# Altium PCB XDM3.2.PcbDoc
Units mil, origin at the board's own origin, x right, y up, seen from the top; angles counter-clockwise.
Board outline 6000 x 4000 mil, 2 copper layers (Top Layer, Bottom Layer); 89 components, 0 nets, 394 pads, 121 vias.
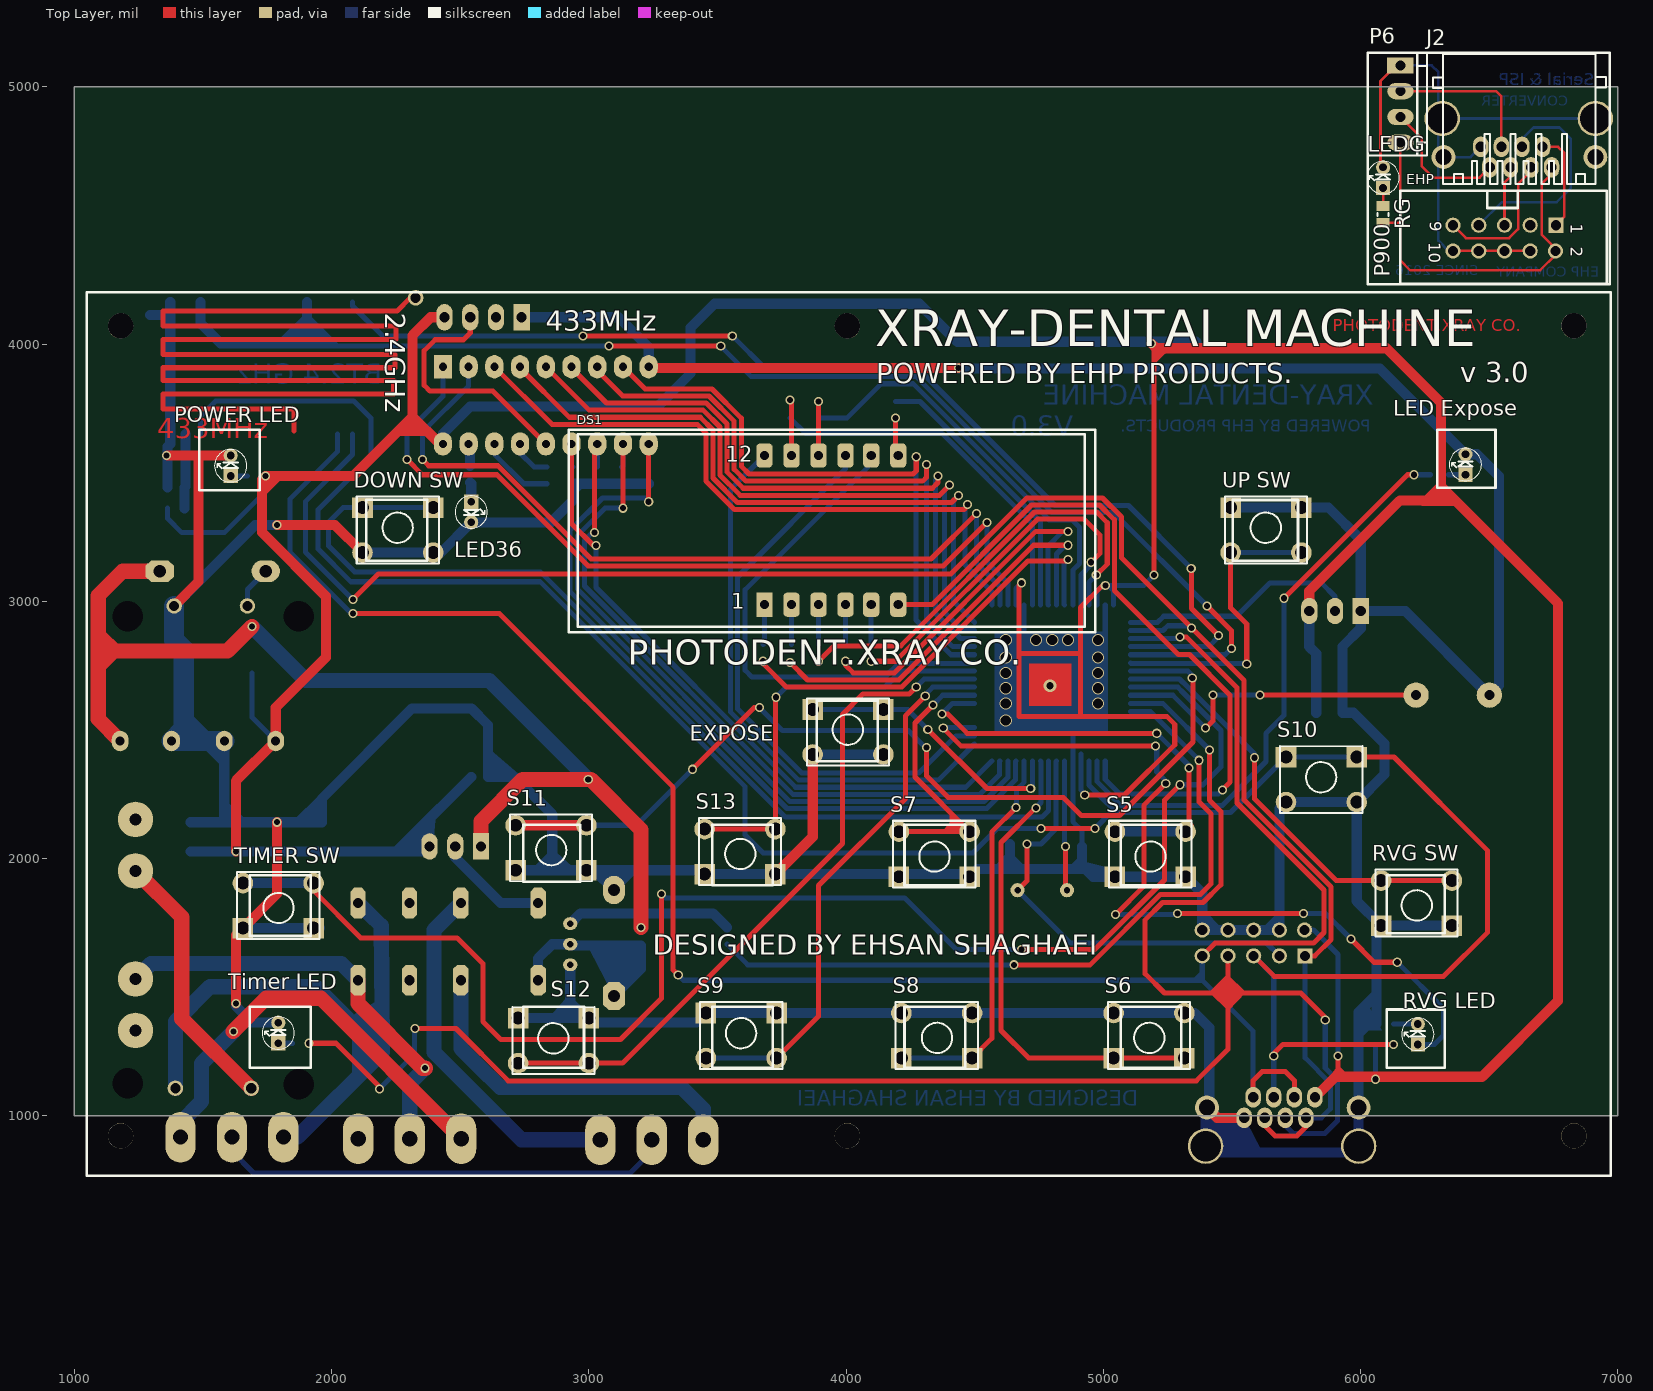
[diagram p0: Top Layer view]
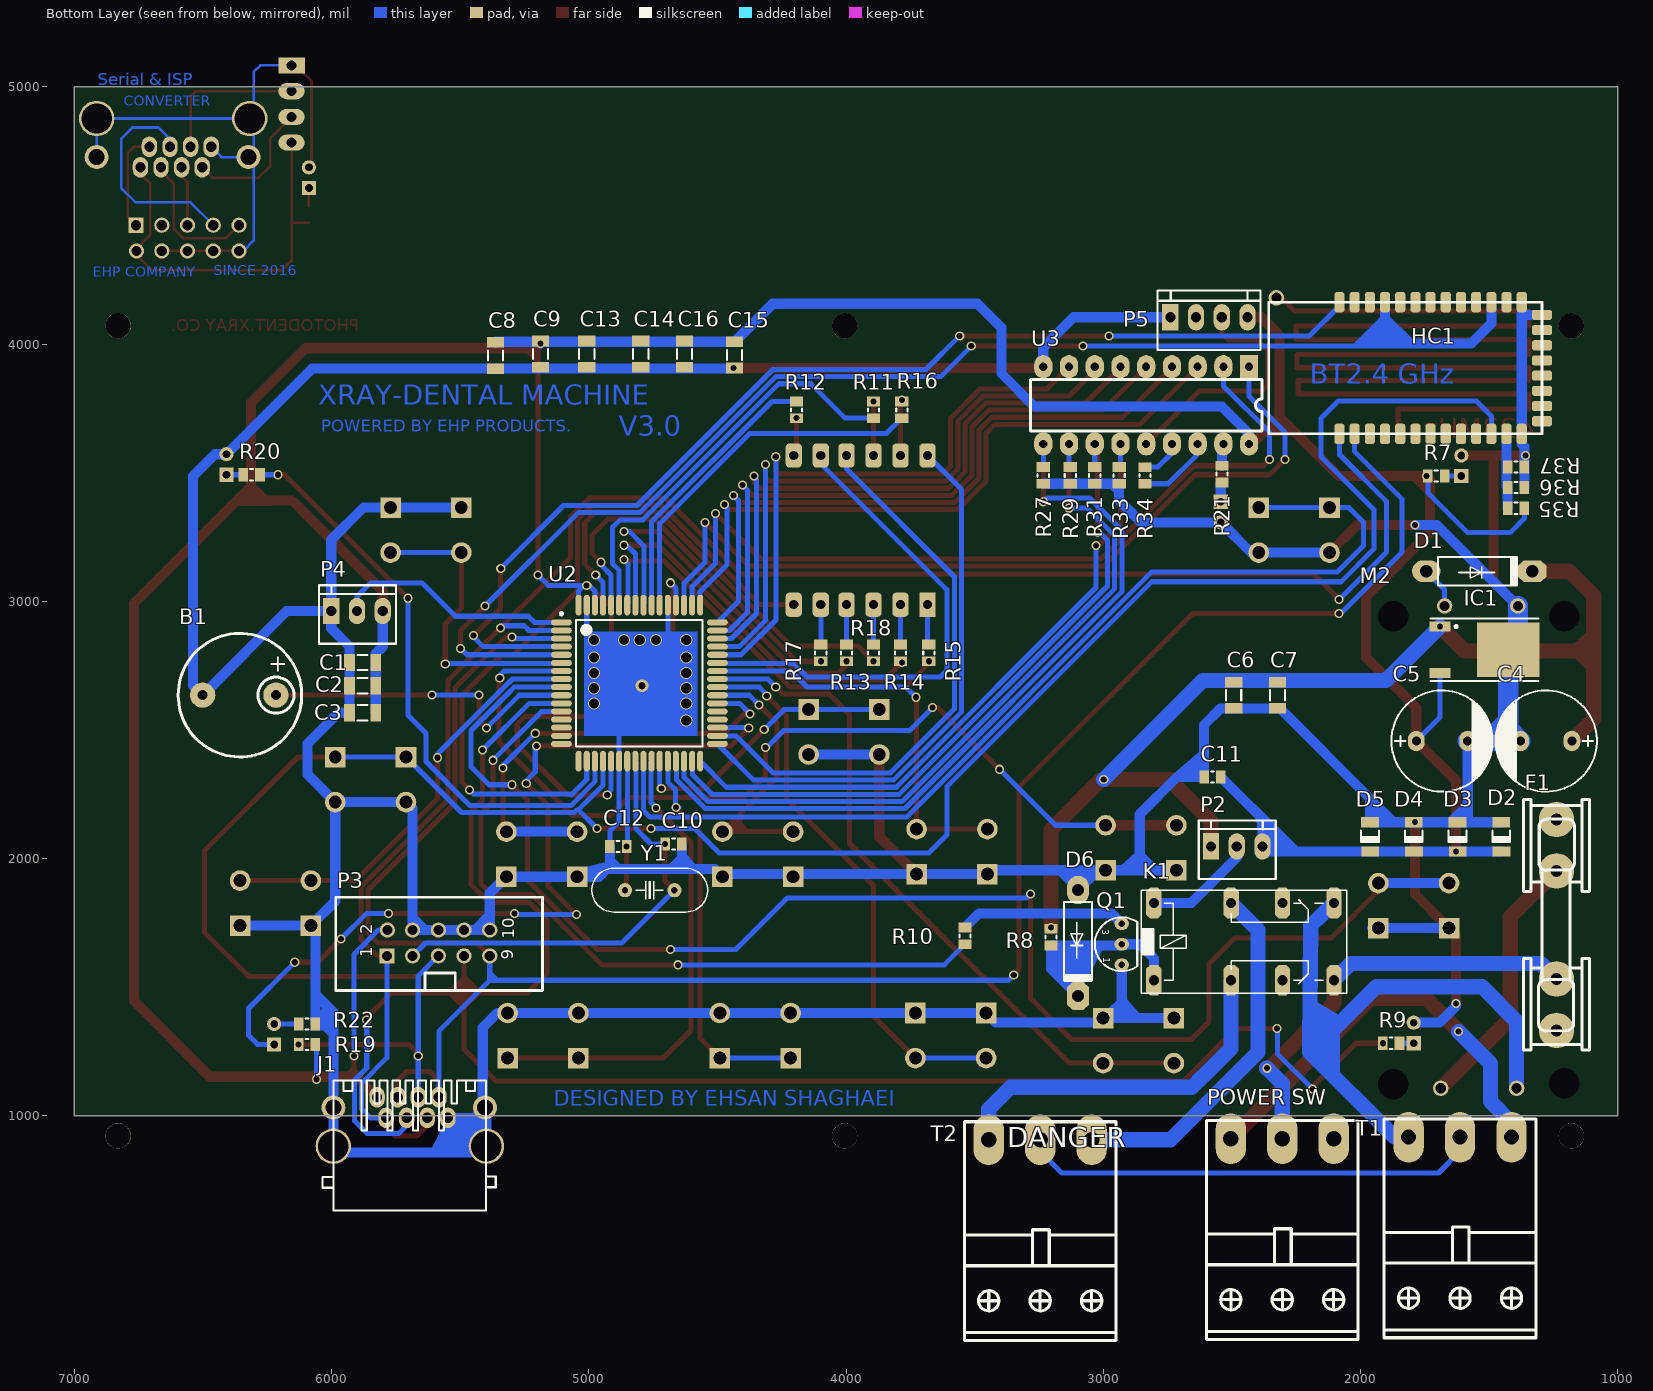
[diagram p1: Bottom Layer view, seen from below]

## Layer stack, top to bottom
Top Solder: solder mask 0.4, Solder Resist, Dk 3.5
Top Layer: signal copper 1.4
Dielectric 1: dielectric 12.6, FR-4, Dk 4.8
Bottom Layer: signal copper 1.4
Bottom Solder: solder mask 0.4, Solder Resist, Dk 3.5

## Board outline
1000,1000 7000,1000 7000,5000 1000,5000

## Design rules (kind name [scope] priority, off if disabled: settings)
Clearance [All] p1: gap=10
PolygonConnect [All] p1: connectstyle=Relief reliefconductorwidth=10 reliefentries=4 polygonreliefangle="90 Angle" airgapwidth=10
RoutingVias [All] p1: holewidth=28 width=50 viastyle="Through Hole" minholewidth=28 minwidth=50 maxholewidth=28 maxwidth=50
SolderMaskExpansion [All] p1: expansion=4
Width [All] p1: maxlimit=10 minlimit=10 preferedwidth=10
30 further rules are at their usual default settings.

## Components (designator, comment, footprint, x,y, rotation, side; value= is the part's Value field where it differs from the comment)
B1 "Buzzer" Buzzer 6368,2647 r180 bottom locked
C1 "10u" SMD_CAP_1206 5828,2762 r0 bottom locked
C2 "10u" SMD_CAP_1206 5828,2672 r0 bottom locked
C3 "100nF" SMD_CAP_1206 5828,2567 r0 bottom locked
C4 "1uF" "cap 04" 1278,2457 r180 bottom locked
C5 "1uF" "cap 04" 1683,2457 r0 bottom locked
C6 "10u" SMD_CAP_1206 2493,2686 r270 bottom locked
C7 "100nF" SMD_CAP_1206 2323,2686 r270 bottom locked
C8 "10u" SMD_CAP_1206 5363,4007 r270 bottom locked
C9 "100nF" SMD_CAP_1206 5188,4012 r270 bottom locked
C10 "18pF" SMD_CAP_0805 4638,2057 r0 bottom locked
C11 "100nF" SMD_CAP_0805 2608,2317 r180 bottom locked
C12 "18pF" SMD_CAP_0805 4918,2047 r180 bottom locked
C13 "10uF" SMD_CAP_1206 5008,4012 r270 bottom locked
C14 "10u" SMD_CAP_1206 4798,4012 r270 bottom locked
C15 "10u" SMD_CAP_1206 4433,4009.2 r270 bottom locked
C16 "100nF" SMD_CAP_1206 4628,4012 r270 bottom locked
D1 "1N4007" My_DO-41 1323.39,3127 r0 bottom locked
D2 "Diode Zener SMD" DIOMELF3615N 1453,2087 r90 bottom locked
D3 "Diode Zener SMD" DIOMELF3615N 1623,2087 r90 bottom locked
D4 "Diode Zener SMD" DIOMELF3615N 1793,2087 r90 bottom locked
D5 "Diode Zener SMD" DIOMELF3615N 1963,2087 r90 bottom locked
D6 "1N4007" My_DO-41 3088,1457 r90 bottom locked
"DOWN SW" "Switch PB" "Switch - Push to On" 2258,3277 r0 top locked
DS1 "7Segment-4Digit-CA" 7segCA 2958,2902 r0 top locked
EXPOSE "Switch PB" "Switch - Push to On" 4008,2492 r0 top locked
F1 "FUSE" FUSE_1 1238,1532 r90 bottom locked
HC1 "HC-05 Bluetooth" HC-05 1688,3907 r90 bottom locked
IC1 "L78M05" TO-252 1558,2812 r270 bottom locked
J1 "RJ45" My_RJ45 5698,742 r180 bottom locked
J2 "RJ45" My_RJ45 6618,5017 r180 top locked
K1 "Relay-DPDT" My_REL_cochick 2653,1677 r180 bottom locked
LED36 "Red" LED-3mm 2543,3347 r270 top locked
"LED Expose" "Red" LED-3mm 6408,3532 r90 top locked
LEDG "Red" LED-3mm 6088,4647 r90 top locked
M2 "220-12 Medule" "AC-DC 220-12" 1073,1027 r90 bottom locked
P2 "LHWR" "Polarized Header 3" 2483,2052 r180 bottom locked
P3 "BoxHeader 2x5" "Box Header 2x5" 5483,1622 r90 bottom locked
P4 "LHWR" "Polarized Header 3" 5903,2967 r180 bottom locked
P5 "LHWR" "Polarized Header 4" 2588,4112 r180 bottom locked
P6 "LHWR" "Polarized Header 4" 6163,4932 r270 top locked
P900 "BoxHeader 2x5" "Box Header 2x5" 6458,4462 r270 top locked
"POWER LED" "Red" LED-3mm 1608,3527 r90 top locked
"POWER SW" "PHONIX3" PHONIX3 2104,911 r0 bottom
Q1 "C945" C945 2928,1667 r270 bottom locked
R7 "330" "RES 0805 (2012X06L)" 1738,3487 r180 bottom locked
R8 "1K" "RES 0805 (2012X06L)" 3203,1662 r90 bottom locked
R9 "330" "RES 0805 (2012X06L)" 1913,1282 r180 bottom locked
R10 "330" "RES 0805 (2012X06L)" 3538,1667 r90 bottom locked
R11 "330" "RES 0805 (2012X06L)" 3783,3712 r90 bottom locked
R12 "330" "RES 0805 (2012X06L)" 4193,3776.96 r270 bottom locked
R13 "330" "RES 0805 (2012X06L)" 3998,2767 r90 bottom locked
R14 "330" "RES 0805 (2012X06L)" 3788,2767 r90 bottom locked
R15 "330" "RES 0805 (2012X06L)" 3678,2767 r90 bottom locked
R16 "330" "RES 0805 (2012X06L)" 3893,3712 r90 bottom locked
R17 "330" "RES 0805 (2012X06L)" 4098,2767 r90 bottom locked
R18 "330" "RES 0805 (2012X06L)" 3893,2767 r90 bottom locked
R19 "10K" "RES 0805 (2012X06L)" 6063.04,1277 r0 bottom locked
R20 "330" "RES 0805 (2012X06L)" 6278,3492 r0 bottom locked
R21 "330" "RES 0805 (2012X06L)" 2538,3527 r270 bottom locked
R22 "330" "RES 0805 (2012X06L)" 6063,1357 r0 bottom locked
R27 "1K" "RES 0805 (2012X06L)" 3233,3522 r270 bottom locked
R29 "1K" "RES 0805 (2012X06L)" 3128,3522 r270 bottom locked
R31 "1K" "RES 0805 (2012X06L)" 3033,3522 r270 bottom locked
R33 "1K" "RES 0805 (2012X06L)" 2938,3522 r270 bottom locked
R34 "820k" "RES 0805 (2012X06L)" 2838,3457 r90 bottom locked
R35 "51k" "RES 0805 (2012X06L)" 1428,3362 r180 bottom locked
R36 "100k" "RES 0805 (2012X06L)" 1363,3442 r0 bottom locked
R37 "100k" "RES 0805 (2012X06L)" 1363,3522 r0 bottom locked
RG "330" "RES 0805 (2012X06L)" 6088,4472 r90 top locked
"RVG LED" "Red" LED-3mm 6223,1317 r90 top locked
"RVG SW" "Switch PB" "Switch - Push to On" 6218,1827 r180 top locked
S5 "Switch PB" "Switch - Push to On" 5183,2017 r180 top locked
S6 "Switch PB" "Switch - Push to On" 5178,1312 r180 top locked
S7 "Switch PB" "Switch - Push to On" 4343,2017 r180 top locked
S8 "Switch PB" "Switch - Push to On" 4353,1312 r180 top locked
S9 "Switch PB" "Switch - Push to On" 3593,1312 r0 top locked
S10 "Switch PB" "Switch - Push to On" 5848,2307 r0 top locked
S11 "Switch PB" "Switch - Push to On" 2853,2042 r180 top locked
S12 "Switch PB" "Switch - Push to On" 2863,1292 r0 top locked
S13 "Switch PB" "Switch - Push to On" 3588,2027 r180 top locked
T1 "PHONIX3" PHONIX3 1413,917 r0 bottom locked
T2 "PHONIX3" PHONIX3 3045,907 r0 bottom
"Timer LED" "Red" LED-3mm 1793,1322 r90 top locked (schematic designator Timer)
"TIMER SW" "Switch PB" "Switch - Push to On" 1793,1817 r180 top locked
U2 "ATmega64A-AU" 64A_M 4803,2682 r180 bottom locked
U3 "PT2272" DIP18 2433,3912 r270 bottom locked
"UP SW" "Switch PB" "Switch - Push to On" 5633,3277 r0 top locked
Y1 "16MHz" "XTAL Small" 4763,1877 r0 bottom locked

## Footprints (in the part's own frame and the unit in brackets; to place one, negate y for a bottom-side part, rotate by r counter-clockwise, add the part's x,y. Pads: shape width x height; smd on the part's side, far side on the other; paste and mask are expansions set on the pad)
7segCA [mm] "7seg-CA; 12 Leads"
  rect 1.6x2.4 hole 0.9: 1(18.415,2.159)
  rrect50% 1.6x2.4 hole 0.9: 2(21.082,2.159) 3(23.749,2.159) 4(26.416,2.159) 5(28.956,2.159) 6(31.623,2.159) 7(31.623,16.891) 8(28.956,16.891) 9(26.416,16.891) 10(23.749,16.891) 11(21.082,16.891) 12(18.415,16.891)
  silkscreen extent 0,0 50.04,19
64A_M [mm] "Thin QFP, 64-Leads, Body 14x14mm, Pitch 0.8mm, IPC Low Density"
  oval 2.05x0.6 smd: 1(-7.7,6) 2(-7.7,5.2) 3(-7.7,4.4) 4(-7.7,3.6) 5(-7.7,2.8) 6(-7.7,2) 7(-7.7,1.2) 8(-7.7,0.4) 9(-7.7,-0.4) 10(-7.7,-1.2) 11(-7.7,-2) 12(-7.7,-2.8) 13(-7.7,-3.6) 14(-7.7,-4.4) 15(-7.7,-5.2) 16(-7.7,-6) 33(7.7,-6) 34(7.7,-5.2) 35(7.7,-4.4) 36(7.7,-3.6) 37(7.7,-2.8) 38(7.7,-2) 39(7.7,-1.2) 40(7.7,-0.4) 41(7.7,0.4) 42(7.7,1.2) 43(7.7,2) 44(7.7,2.8) 45(7.7,3.6) 46(7.7,4.4) 47(7.7,5.2) 48(7.7,6)
  oval 0.6x2.05 smd: 17(-6,-7.7) 18(-5.2,-7.7) 19(-4.4,-7.7) 20(-3.6,-7.7) 21(-2.8,-7.7) 22(-2,-7.7) 23(-1.2,-7.7) 24(-0.4,-7.7) 25(0.4,-7.7) 26(1.2,-7.7) 27(2,-7.7) 28(2.8,-7.7) 29(3.6,-7.7) 30(4.4,-7.7) 31(5.2,-7.7) 32(6,-7.7) 49(6,7.7) 50(5.2,7.7) 51(4.4,7.7) 52(3.6,7.7) 53(2.8,7.7) 54(2,7.7) 55(1.2,7.7) 56(0.4,7.7) 57(-0.4,7.7) 58(-1.2,7.7) 59(-2,7.7) 60(-2.8,7.7) 61(-3.6,7.7) 62(-4.4,7.7) 63(-5.2,7.7) 64(-6,7.7)
  silkscreen extent -7.83,-6.25 6.25,6.97, body extent -7,-7 7,7, height 1.2
"AC-DC 220-12" [mil]
  round 60 hole 39.37: 0(1955,600) 1(1955,315) 2(80,615) 3(80,320)
  round 60 hole 118.11: 4(1915,135) 5(1915,800) 6(95,800) 7(100,135)
  body extent 6,-5 2014,940, height 118
"Box Header 2x5" [mm]
  rect 1.5x1.5 hole 1: 1(-0.006,7.666)
  round 1.5 hole 1: 2(2.54,7.62) 3(-0.006,5.126) 4(2.534,5.126) 5(-0.006,2.586) 6(2.534,2.586) 7(-0.006,0.046) 8(2.534,0.046) 9(-0.006,-2.494) 10(2.534,-2.494)
  silkscreen extent -3.42,-7.7 5.8,12.7, body extent -3.4,-7.7 5.7,12.66, height 9.43
Buzzer [mm] "Magnetic Transducer"
  round 2.5 hole 1: 1(3.859,-0.297) 2(-3.38,-0.297)
  silkscreen extent -5.8,-6.4 6.4,5.8, body extent -5.67,-6.39 6.17,5.45, height 6.98
C945 [mil] "NPN Transistor"
  oval 50x55 hole 25: 1(80,0) 2(0,0) 3(-80,0)
  silkscreen extent -105,-105 105,61, body extent -94,-96 95,58, height 315
"cap 04" [mil]
  oval 65x80 hole 35: 1(100,0) 2(-100,0)
  silkscreen extent -197,-197 197,197, body extent -198,-197 198,199, height 513
DIOMELF3615N [mm] "MELF Diode, 2-Leads, Body 3.6x1.5mm, IPC Medium Density"
  rect 1x1.75 smd: 1(-1.495,-0.03) 2(1.38,-0.005)
  silkscreen extent -0.55,-0.88 0.55,0.88, body extent -1.61,-0.83 1.54,0.67, height 1.45
DIP18 [mm]
  rect 2.3x1.8 hole 0.8: 1(0,0)
  oval 2.3x1.8 hole 0.8: 2(0,-2.54) 3(0,-5.08) 4(0,-7.62) 5(0,-10.16) 6(0,-12.7) 7(0,-15.24) 8(0,-17.78) 9(0,-20.32) 10(7.62,-20.32) 11(7.62,-17.78) 12(7.62,-15.24) 13(7.62,-12.7) 14(7.62,-10.16) 15(7.62,-7.62) 16(7.62,-5.08) 17(7.62,-2.54) 18(7.62,0)
  silkscreen extent 1.27,-21.59 6.35,1.27
FUSE_1 [mm]
  round 3.5 hole 1.2: 1(0,0) 2(10.668,0) ""(-5.08,0) ""(15.748,0)
  silkscreen extent -7.04,-3.25 17.7,3.25
HC-05 [mm]
  rrect50% 2x1 smd: 1(-6.5,10) 2(-6.5,8.5) 3(-6.5,7) 4(-6.5,5.5) 5(-6.5,4) 6(-6.5,2.5) 7(-6.5,1) 8(-6.5,-0.5) 9(-6.5,-2) 10(-6.5,-3.5) 11(-6.5,-5) 12(-6.5,-6.5) 13(-6.5,-8) 22(6.5,-8) 23(6.5,-6.5) 24(6.5,-5) 25(6.5,-3.5) 26(6.5,-2) 27(6.5,-0.5) 28(6.5,1) 29(6.5,2.5) 30(6.5,4) 31(6.5,5.5) 32(6.5,7) 33(6.5,8.5) 34(6.5,10)
  rrect50% 1x2 smd: 14(-5.254,-10) 15(-3.754,-10) 16(-2.254,-10) 17(-0.754,-10) 18(0.746,-10) 19(2.246,-10) 20(3.746,-10) 21(5.246,-10)
  silkscreen extent -6.5,-10 6.5,17, body extent -6.5,-9.77 6.5,17.13, height 2.5
LED-3mm [mil]
  rect 55x55 hole 30: 1(-40,0)
  round 55 hole 30: 2(40,0)
  silkscreen extent -63,-63 63,63, body extent -69,-69 69,69, height 154
My_DO-41 [mil]
  oval 110x85 hole 47.24: A(420.71,10)
  oct 110x85 hole 47.24: K(8.9,10)
  silkscreen extent 64,-45 375,65
My_REL_cochick [mil]
  oct 60x120 hole 40: 1(-150,-150) 2(-150,150) O1(350,-150) O2(350,150) P1(150,-150) P2(150,150) S1(550,-150) S2(550,150)
  silkscreen extent -200,-200 600,200
My_RJ45 [mil]
  oval 60x80 hole 40: 1(150,250) 2(115,330) 3(70,250) 4(35,330) 5(-10,250) 6(-45,330) 7(-90,250) 8(-125,330)
  round 137.8 hole 118.11 unplated: shild(-295,140) shild(300,140)
  round 92.99 hole 62.01: shild(-295,290) shild(295,290)
  silkscreen extent -336,-110 336,395
PHONIX3 [mm]
  oval 3x5 hole 1.5: 1(0,0) 2(5.08,0) 3(10.16,0)
  silkscreen extent -2.41,-1.78 12.57,19.81
"Polarized Header 3" [mm]
  rect 1.6x2.6 hole 1: 1(-2.49,-0.12)
  oval 1.6x2.6 hole 1: 2(0.05,-0.12) 3(2.59,-0.12)
  silkscreen extent -3.7,-3.35 3.9,2.42, body extent -3.72,-3.35 3.9,2.45, height 10.75
"Polarized Header 4" [mm]
  rect 1.6x2.6 hole 1: 1(-3.84,-0.2)
  oval 1.6x2.6 hole 1: 2(-1.3,-0.2) 3(1.24,-0.2) 4(3.78,-0.2)
  silkscreen extent -5.1,-3.42 5.05,2.45, body extent -5.06,-3.43 5.1,2.37, height 10.75
"RES 0805 (2012X06L)" [mm] "Chip Resistor, 2-Leads, Body 2.0x1.3mm, IPC High Density _ (0.100 W)"
  rect 0.95x1.3 smd: 1(0,0) 2(1.65,0)
  silkscreen extent 0.67,-0.55 0.98,0.55, body extent -0.19,-0.63 1.84,0.64, height 0.6
SMD_CAP_0805 [mm]
  rect 0.95x1.3 smd: 1(0,0) 2(1.65,0)
  silkscreen extent 0.67,-0.55 0.98,0.55, body extent -0.19,-0.64 1.84,0.63, height 0.65
SMD_CAP_1206 [mm]
  rect 1.05x1.7 smd: 1(0,0) 2(2.596,0)
  silkscreen extent 0.8,-0.75 1.8,0.75, body extent -0.22,-0.77 2.82,0.75, height 0.75
"Switch - Push to On" [mil]
  rect 80x80 hole 50: 1(-137.5,87.5) 1(137.5,87.5)
  round 80 hole 50: 2(-137.5,-87.5) 2(137.5,-87.5)
  silkscreen extent -160,-130 160,130, body extent -155,-121 157,123, height 205
TO-252 [mm] "D-PAK/TO-252-AA; 3 Leads (1 Cropped); Body 10.1 (inc. leads) x 6.6 mm (LxW max)"
  rect 1x2.1 smd: 1(-2.285,-3.375) 3(2.285,-3.375)
  rect 5.4x6.2 smd: 4(0,3.375)
  silkscreen extent -3.08,-4.33 3.08,6.37, body extent -3.27,-4.11 3.27,5.83, height 2.39
"XTAL Small" [mil]
  round 55 hole 25: 1(-96.06,0) 2(96.06,0)
  silkscreen extent -225,-85 225,85, body extent -226,-89 226,89, height 140

## Part data
C1 C2 C3 C6 C7 C8 C9 C10 C11 C12 C13 C14 C15 C16: library part Cap-Bipolar, "Bipolar Capacitor"
C4 C5: library part Cap-Polar, "Polar Capacitor"
D1 D6: "1 Amp Diode"
"DOWN SW" EXPOSE "RVG SW" S5 S6 S7 S8 S9 S10 S11 S12 S13 "TIMER SW" "UP SW": "Push Button Switch"
DS1: library part 7Seg-4Digit-CA, "7-Segment Display: CA"
IC1: "Precision 500mA Regulator"
J1 J2: "Right Angle, Standard Profile, RJ45-Keyed, Flange Mount PCB Jack"
K1: "Dual-Pole Dual-Throw Relay"
LED36 "LED Expose" LEDG "POWER LED" "RVG LED" "Timer LED": library part LED, "LED"
P2 P4: library part "3pin LHWR"
P5 P6: library part "4pin LHWR"
Q1: "NPN Transistor"
R7 R8 R9 R10 R11 R12 R13 R14 R15 R16 R17 R18 R19 R20 R21 R22 R27 R29 R31 R33 R34 R35 R36 R37 RG: library part Resistor, "Resistor"
U2: "8-bit AVR Microcontroller, 64KB Flash, 2KB EEPROM, 4KB SRAM, 64-pin TQFP, Industrial Grade (-40°C to 85°C)"
Y1: library part XTAL, "XTAL Crystal"

## Free pads (board coordinates)
  round 98.43 hole 98.43: 1(1180.36,921.54) 1(1180.36,4071.15) 1(4005.16,921.54) 1(4005.16,4071.15) 1(6829.96,921.54) 1(6829.96,4071.15)
  round 60 hole 39.37: ANTENNA(2327,4180)

## Via types
v1: diameter 35.43, hole 23.62, Top Layer to Bottom Layer, 106 vias
v2: diameter 47.24, hole 39.37, Top Layer to Bottom Layer, 14 vias
v3: diameter 50, hole 28, Top Layer to Bottom Layer, 1 vias

## Nets (pads, with @x,y where several pads share a name; then routed paths per layer and width w, separated by ;. In a path a pad name is that pad's centre, name@x,y a point inside that pad or via, vN(x,y) a via of type N, cw(c..) or ccw(c..) an arc to the next point about the centre after c; other vN are vias at no path point)
pads on no net: "DOWN SW.1" "DOWN SW.2" "LED Expose.1" "LED Expose.2" "POWER LED.1" "POWER LED.2" "POWER SW.1" "POWER SW.2" "POWER SW.3" "RVG LED.1" "RVG LED.2" "RVG SW.1" "RVG SW.2" "Timer LED.1" "Timer LED.2" "TIMER SW.1" "TIMER SW.2" "UP SW.1" "UP SW.2" B1.1 B1.2 C1.1 C1.2 C2.1 C2.2 C3.1 C3.2 C4.1 C4.2 C5.1 C5.2 C6.1 C6.2 C7.1 C7.2 C8.1 C8.2 C9.1 C9.2 C10.1 C10.2 C11.1 C11.2 C12.1 C12.2 C13.1 C13.2 C14.1 C14.2 C15.1 C15.2 C16.1 C16.2 D1.A D1.K D2.1 D2.2 D3.1 D3.2 D4.1 D4.2 D5.1 D5.2 D6.A D6.K DS1.1 DS1.2 DS1.3 DS1.4 DS1.5 DS1.6 DS1.7 DS1.8 DS1.9 DS1.10 DS1.11 DS1.12 EXPOSE.1 EXPOSE.2 F1. F1.1 F1.2 HC1.1 HC1.2 HC1.3 HC1.4 HC1.5 HC1.6 HC1.7 HC1.8 HC1.9 HC1.10 HC1.11 HC1.12 HC1.13 HC1.14 HC1.15 HC1.16 HC1.17 HC1.18 HC1.19 HC1.20 HC1.21 HC1.22 HC1.23 HC1.24 HC1.25 HC1.26 HC1.27 HC1.28 HC1.29 HC1.30 HC1.31 HC1.32 HC1.33 HC1.34 IC1.1 IC1.3 IC1.4 J1.1 J1.2 J1.3 J1.4 J1.5 J1.6 J1.7 J1.8 J1.shild J2.1 J2.2 J2.3 J2.4 J2.5 J2.6 J2.7 J2.8 J2.shild K1.1 K1.2 K1.O1 K1.O2 K1.P1 K1.P2 K1.S1 K1.S2 LED36.1 LED36.2 LEDG.1 LEDG.2 M2.0 M2.1 M2.2 M2.3 M2.4 M2.5 M2.6 M2.7 P2.1 P2.2 P2.3 P3.1 P3.2 P3.3 P3.4 P3.5 P3.6 P3.7 P3.8 P3.9 P3.10 P4.1 P4.2 P4.3 P5.1 P5.2 P5.3 P5.4 P6.1 P6.2 P6.3 P6.4 P900.1 P900.2 P900.3 P900.4 P900.5 P900.6 P900.7 P900.8 P900.9 P900.10 Q1.1 Q1.2 Q1.3 R7.1 R7.2 R8.1 R8.2 R9.1 R9.2 R10.1 R10.2 R11.1 R11.2 R12.1 R12.2 R13.1 R13.2 R14.1 R14.2 R15.1 R15.2 R16.1 R16.2 R17.1 R17.2 R18.1 R18.2 R19.1 R19.2 R20.1 R20.2 R21.1 R21.2 R22.1 R22.2 R27.1 R27.2 R29.1 R29.2 R31.1 R31.2 R33.1 R33.2 R34.1 R34.2 R35.1 R35.2 R36.1 R36.2 R37.1 R37.2 RG.1 RG.2 S5.1 S5.2 S6.1 S6.2 S7.1 S7.2 S8.1 S8.2 S9.1 S9.2 S10.1 S10.2 S11.1 S11.2 S12.1 S12.2 S13.1 S13.2 T1.1 T1.2 T1.3 T2.1 T2.2 T2.3 U2.1 U2.2 U2.3 U2.4 U2.5 U2.6 U2.7 U2.8 U2.9 U2.10 U2.11 U2.12 U2.13 U2.14 U2.15 U2.16 U2.17 U2.18 U2.19 U2.20 U2.21 U2.22 U2.23 U2.24 U2.25 U2.26 U2.27 U2.28 U2.29 U2.30 U2.31 U2.32 U2.33 U2.34 U2.35 U2.36 U2.37 U2.38 U2.39 U2.40 U2.41 U2.42 U2.43 U2.44 U2.45 U2.46 U2.47 U2.48 U2.49 U2.50 U2.51 U2.52 U2.53 U2.54 U2.55 U2.56 U2.57 U2.58 U2.59 U2.60 U2.61 U2.62 U2.63 U2.64 U3.1 U3.2 U3.3 U3.4 U3.5 U3.6 U3.7 U3.8 U3.9 U3.10 U3.11 U3.12 U3.13 U3.14 U3.15 U3.16 U3.17 U3.18 Y1.1 Y1.2
copper on no net: | length 222773.5
  Top Layer w10: 6088,4472 6155.13,4472 ; 6088,4536.96 6088,4607 ; 6088,4687 6078,4697 6078,5022 6139.18,5083.18 6155.13,5083.18 ; 6155.13,4783.18 6155.13,4472 ; 6155.13,4883.18 6238,4800.31 6238,4692 6283,4647 6463,4647 6503,4687 ; 6155.13,4983.18 6526.82,4983.18 6548,4962 6548,4767 ; 6303,4707 6323,4727 ; 6342.76,4362.24 6359.81,4362.24 6459.81,4362.24 6559.81,4362.24 6659.81,4362.24 ; 6359.81,4462.24 6410.05,4412 6578,4412 6613,4447 6613,4622 6663,4672 6663,4687 ; 6559.81,4462.24 6559.81,4628.81 6583,4652 6583,4687 ; 6708,4767 6768,4767 6793,4742 6793,4495.43 6759.81,4462.24 ; 6753,4687 6743,4687 6743,4662 6705.5,4624.5 6705.5,4424.5 6758,4372 6758,4362 6758,4347 6698,4287 6193,4287 6155.13,4324.87 6155.13,4472
  Top Layer w19.68: 1854,3663 1854,3747 1345,3747 1345,3806 2242,3806 2242,3859 1344,3859 1344,3908 2247,3908 2247,3960 1345.5,3960 1345.5,4018 2247,4018 ; v1(1913,1282) 2017,1282 2193,1106 2191,1104 v1(2186,1104) ; 1930.5,1904.5 1930.5,1874.5 2113,1692 2488,1692 2588,1592 2588,1367 2658,1297 3123,1297 3283,1457 v1(3283,1862) ; v1(2083,2952) 2653,2952 3328,2277 3328,1567 v1(3348,1547) ; v1(2083,3007) 2183,3107 4408,3107 4703,3402 4997.21,3402 5070.68,3328.53 5070.68,3169.32 v1(5343,2897) 5548,2692 5548,2227.26 5886,1889.26 5886,1685 5822.76,1621.76 5784.81,1621.76 ; 2250,4018 2250,4071 1344,4071 1344,4129 1434,4129 2255,4129 2306,4180 2327,4180 ; v1(2293,3552) 2353,3492 2643.03,3492 2998.03,3137 4378,3137 v1(4548,3307) ; v1(2324,1339) 2484,1339 2687,1136 5362,1136 5484.81,1258.81 5484.81,1477 ; v1(2353,3552) 2378,3527 2647,3527 3009.44,3164.56 4330.56,3164.56 v1(4508,3342) ; 2539.18,4104.13 2539.18,4043.18 2513,4017 2403,4017 2360,3974 2360,3840 2383,3817 2628,3817 2833,3612 ; 2633,3912 2857,3688 3422,3688 3455.21,3654.8 3455.21,3467.8 3566,3357 4458.76,3357 4473,3371.24 v1(4473,3377) ; 2725.5,1204.5 3000.5,1204.5 3131.53,1204.5 3986,2058.97 3986,2560 4065.44,2639.44 4228.39,2639.44 4228.48,2639.53 4245.53,2639.53 v1(4273,2667) ; 2733,3912 2733,3907 2924.44,3715.56 3433.42,3715.56 3482.76,3666.21 3482.76,3479.21 3577.42,3384.56 4410.56,3384.56 v1(4438,3412) ; 2833,3912 3001.88,3743.12 3444.83,3743.12 3510.32,3677.63 3510.32,3490.63 3588.83,3412.12 4363.12,3412.12 v1(4403,3452) ; 2933,3612 2933,3302 3018,3217 v1(3028,3217) ; 2933,3912 2933,3907 3069.32,3770.68 3456.25,3770.68 3537.88,3689.04 3537.88,3502.04 3600.25,3439.68 4335.68,3439.68 4358,3462 v1(4358,3487) ; v1(2978,4032) v1(3558,4032) ; v1(3023,3267) 3023,3592 3018,3597 3033,3612 ; 3033,3912 3018,3912 3131.76,3798.24 3467.66,3798.24 3565.44,3700.46 3565.44,3513.46 3611.66,3467.24 4298.24,3467.24 4313,3482 v1(4313,3532) ; v1(3078,3992) v1(3513,3992) ; v1(3133,3362) 3133,3612 ; 3133,3912 3219.21,3825.8 3479.08,3825.8 3593,3711.87 3593,3524.87 3623.08,3494.8 4260.8,3494.8 4273,3507 v1(4273,3562) ; v1(3233,3387) 3233,3612 ; v1(3403,2347) 3643,2587 v1(3663,2587) ; 3450.5,2114.5 3725.5,2114.5 3725.5,2624.5 v1(3728,2627) ; v1(3678,2767) 3678,2757 3768,2667 4216.97,2667 4706.97,3157 4857.89,3157 v1(4862.89,3162) ; 3730.5,1224.5 3893,1387 3893,1895 4231,2233 4231,2555 v1@4300.5,2624.5 ; v1(3783,2762) 3850.44,2694.56 4205.56,2694.56 4729.01,3218.01 v1@4853,3218.01 ; v1(3783,3782) 3788,3777 3788,3567 ; v1(3893,2767) 3953,2827 4213,2827 4732.88,3346.88 4974.38,3346.88 5015.56,3305.7 5015.56,3144.56 v1(4973,3102) ; 3893,3567 v1(3893,3776.96) ; v1(3998,2767) 3998,2752 4027.88,2722.12 4188.12,2722.12 4738,3272 4843,3272 ; v1(4098,2767) 4191.97,2767 4744.3,3319.32 4925.68,3319.32 4988,3257 4988,3187 v1(4953,3152) ; v1(4193,3712) 4193,3577 4203,3567 ; 4203,2987 4334.03,2987 4721.47,3374.44 4985.8,3374.44 5043.12,3317.12 5043.12,3076.99 5043.43,3076.68 5043.43,3041.57 5292,2793 5335,2793 5492.88,2635.12 5492.88,2296.88 v1(5463,2267) ; 4205.5,2104.5 4480.5,2104.5 4268,2317 4268,2527 v1(4338,2597) ; v1(4313,2432) 4313,2322 4397.57,2237.43 4702.46,2237.43 4703.32,2236.57 4732.68,2236.57 4733.54,2237.43 4844.57,2237.43 4915,2167 5063,2167 5349,2453 5349,2699 v1(5346,2702) ; v1(4318,2502) 4548,2272 v1(4718,2272) ; v1(4373,2562) 4396,2562 4471,2487 v1(5208,2487) ; v1(4378,2507) 4448,2437 v1(5203,2437) ; 4490.5,1224.5 4567,1301 4567,2104 v1(4661,2198) ; v1(4653,1587) 4949,1587 5223,1861 5378.03,1861 5419,1901.97 5419,2174 5373,2220 v1(5373,2382) ; 4666.94,1877 4702.96,1913.02 v1(4702.96,2057) ; v1(4683,1647) 4968,1647 5238,1917 5238,2227 v1(5298,2287) ; v1(4683,3072) 4672,3061 4672,2553 5247,2553 5278,2522 5278,2442 5083,2247 v1(4928,2247) ; v1(4738,2197.22) 4603,2062.22 4603,1332 4710.5,1224.5 5040.5,1224.5 5315.5,1224.5 ; v1(4758,2117) 4963,2117 4968,2122 v1(4968,2117) ; v1(4853.04,2047) 4853.04,1883.02 4859.06,1877 ; 4912,2556 4912,2976 4998,3062 v1(5008,3062) ; v1(5048,1782) 5158,1892 5158,2207 v1(5243,2292) ; v1(5188,4002) 5198,3992 v1(5198,3102) ; v1(5288,1787) v1(5778,1787) ; v1(5298,2862) 5323,2862 5520.44,2664.56 5520.44,2215.58 5858.44,1877.58 5858.44,1712.44 5817,1671 5434.05,1671 5384.81,1621.76 ; 5320.5,2104.5 5343,2127 5333,2137 5333,2271.89 5333.43,2272.32 5333.43,2351.57 v1(5333,2352) ; v1(5342,3128) 5343,3127 5343,2972 v1(5448,2867) ; v1(5398,2507) 5426.31,2535.31 v1(5426.31,2635.31) ; v1(5403,2982) 5498,2887 v1(5498,2817) ; v1(5413,2422) 5413,2227 5457,2183 5457,1898 5388,1829 5230,1829 5163,1762 5163,1552 5238,1477 5484.81,1477 ; 5484.81,1621.76 5484.81,1477 ; 5495.5,3189.5 5495.5,2974.5 5558,2912 v1(5558,2757) ; 5583,1072 5583,1137 5618,1172 5708,1172 5743,1137 5743,1072 ; 5584.81,1621.76 5664.57,1542 6323,1542 6493,1712 6493,2032 6130.5,2394.5 5985.5,2394.5 ; v1(5588,2392) 5588,2232 5905.5,1914.5 6080.5,1914.5 6355.5,1914.5 ; v1(5609.69,2635.31) 6216.07,2635.31 ; 5628,992 5628,962 5668,922 5753,922 5788,957 5788,992 ; v1(5663,1232) 5663,1242 5698,1277 v1(6128,1277) ; v1(5703,3012) 6183,3492 v1(6208,3492) ; 5823,1072 5833,1072 5913,1152 v1(5913,1232) ; v1(5863,1372) 5863,1382 5768,1477 5484.81,1477 ; v1(5963,1687) 6053,1597 v1(6143,1597) ; v1(6058,1142) v1@6058,1152
  Top Layer w39.37: v1@1363,3567 1483,3567 ; 1388,2982 1483,3077 1483,3567 ; 1608,3567 1483,3567 ; v1(1628,1437) 1628,1702 1655.5,1729.5 1788,1862 v1(1788,2141.33) ; v1(1628,2027) 1628,2302 1783,2457 1783,2587 1978,2782 1978,3020 1730,3268 1730,3474 v1(1743,3487) 2084,3487 2315,3718 2421,3612 2433,3612 ; v1(1788,3297) 2013,3297 2120.5,3189.5 ; 2315,3722 2315,4034 2385.13,4104.13 2439.18,4104.13 ; 2715.5,2129.5 2990.5,2129.5 ; 3238,3907 v1(4438,3907) ; 3725.5,1939.5 3870.5,2084.5 3870.5,2404.5 ; v1(5188,4002) 5206,3984 6101,3984 6313,3772 6313,3447 ; 5403,1032 5443,992 5548,992 ; 5801.03,2962.28 5801.03,3040.03 6153,3392 6258,3392 6313,3447 ; 5823,1072 5903,1152 5913,1152 6058,1152 6473,1152 6768,1447 6768,2992 6313,3447
  Top Layer w59.06: 1178,2457 1093,2542 1093,2807 ; 1238,1952 1418,1772 1418,1377 1688,1107 ; 1332.29,3117 1188,3117 1093,3022 1093,2807 ; v1@1616.5,1327.5 1746,1457 1958.95,1457 2504,911.95 2504,911 ; 1630,940 1640,940 ; v1(1690.87,2901.96) 1595.91,2807 1093,2807 ; 2103,1527 2103,1436 2354,1185 v1(2364,1185) ; 2581.03,2047.28 2581.03,2145.03 2743,2307 v1(2998,2307) 3008,2307 3203,2112 v1(3203,1732)
  Bottom Layer w10: 6155.13,5083.18 6276.82,5083.18 6303,5057 ; 6303,4707 6303,4402 6342.76,4362.24 ; 6459.81,4462.24 6549.57,4552 6763,4552 6818,4607 6818,4797 6773,4842 6673,4842 6628,4797 6628,4767 ; 6468,4767 6428,4727 6323,4727 6303,4747 6303,4862 ; 6913,4727 6913,4877 6318,4877 6303,4862 ; 6303,4862 6303,5057 ; 6303,4862 6303,5057
  Bottom Layer w19.68: 1363.04,3362 1363.04,3321.96 1418,3267 1583,3267 1738,3422 v1@1738,3487 ; 1491.15,3651.09 1491.15,3720.15 1550,3779 2086,3779 2153,3712 2153,3562 1948,3357 1948,3203 2075,3076 2811.05,3076 3608,2279.05 3608,2092 3678,2022 4493,2022 4588,2117 v1(4758,2117) ; 1608,3487 1673.04,3487 ; 1613,917 1613,862 1697,778 3161,778 3245,862 3245,907 ; 1673,2982 1673,3045.9 1744.1,3117 ; 1690.87,2722.04 1690.87,2549.13 1783,2457 ; 1793,1282 1848.04,1282 ; 1904.54,4110.46 2023,3992 v1(3078,3992) ; 2022.65,3651.09 2022.65,3581.65 1838,3397 1838,3192 v1@2078,2952 ; 2081.7,3651.09 2081.7,3570.7 1898,3387 1898,3192 v1(2083,3007) ; 2081.7,4162.91 2081.7,4148.3 2198,4032 v1(2978,4032) ; v1(2186,1104) 2323,1241 2323,1338 v1(2324,1339) ; v1(2293,3552) 2293,3657 2433,3797 2433,3912 ; 2323,2686 2493,2686 ; v1(2353,3552) 2353,3657 2533,3837 2533,3912 ; 2395.5,3364.5 2120.5,3364.5 2045.5,3364.5 1988,3307 1988,3215.97 2089.42,3114.56 2811.47,3114.56 3764.03,2162 4181.38,2162 4181.59,2162.22 4229.41,2162.22 4229.62,2162 4456.38,2162 4456.59,2162.22 4504.41,2162.22 4504.84,2161.79 4548.1,2161.79 4548.32,2161.57 4577.68,2161.57 4577.9,2161.79 4762.79,2161.79 4787.25,2186.25 4787.25,2378.85 ; 2633,3612 2633,3572 2748,3457 2838,3457 ; 2733,3612 2733,3577 2788.04,3521.96 2838,3521.96 ; 2933,3612 2933,3527 2938,3522 ; 2990.5,2129.5 3185.5,2129.5 v1(3403,2347) ; v1(3023,3267) 3013,3267 2983,3237 2983,3059.95 3793.27,2249.68 4520.68,2249.68 4596.31,2325.31 4596.31,2378.85 4598.28,2378.85 ; v1(3028,3217) 3028,3053.92 3804.69,2277.24 4465.17,2277.24 4566.78,2378.85 ; 3033,3522 3033,3612 ; 3128,3522 3133,3527 3133,3612 ; v1(3133,3362) 3063,3362 2955.44,3254.44 2955.44,3048.53 3781.86,2222.12 4536.14,2222.12 4629.77,2315.75 4629.77,2378.85 ; v1(3233,3387) 3218,3402 3053,3402 2927.88,3276.88 2927.88,3037.12 3770.44,2194.56 4547.56,2194.56 4659.3,2306.3 4659.3,2376.88 4661.27,2378.85 ; 3233,3522 3233,3612 ; v1(3283,1862) 3298,1847 4228,1847 4428,1647 v1(4683,1647) ; v1(3348,1547) 3368,1527 5384.81,1527 5583,1328.81 5583,1072 ; 3455.5,1224.5 3730.5,1224.5 ; v1(3513,3992) 3631.56,3873.44 4272.58,3873.44 4801.47,3344.56 5040.44,3344.56 v1(5403,2982) ; 3538,1667 3618,1587 v1(4653,1587) ; v1(3558,4032) 3689,3901 4284,3901 4812.88,3372.12 5097.88,3372.12 v1(5342,3128) ; v1(3663,2587) 3753,2497 4243,2497 4308,2432 v1(4313,2432) ; 3678,2831.96 3683,2836.96 3683,2987 ; 3683,3567 3550.44,3434.44 3550.44,2570.46 3816.1,2304.8 4358.87,2304.8 4499.85,2445.78 ; v1(3728,2627) 3768,2667 4151.97,2667 4214.22,2729.24 4499.85,2729.24 ; 3783,3712 3843,3652 4374.03,3652 4724.26,3301.77 4724.26,2985.15 ; 3788,2831.96 3788,2987 ; 3870.5,2579.5 4145.5,2579.5 4240.5,2579.5 v1(4318,2502) ; 3893,2831.96 3893,2987 ; 3893,3712 4003,3712 4136.88,3845.88 4261.17,3845.88 4790.05,3317 4878,3317 4908.43,3286.57 4908.43,3147.43 4881.74,3120.74 4881.74,2985.15 ; 3998,2831.96 3998,2987 ; 3998,3567 3998,3515 3578,3095 3578,2581.87 3827.52,2332.35 4282.35,2332.35 4427.28,2477.28 4499.85,2477.28 ; 4098,2831.96 4098,2987 ; 4098,3567 4098,3535 3608,3045 3608,2732 3634,2706 4152,2706 4204.77,2758.77 4497.88,2758.77 4499.85,2760.74 ; 4193,3776.96 4288.04,3776.96 4755.76,3309.24 4755.76,2985.15 ; 4215.5,1224.5 4490.5,1224.5 ; v1(4273,2667) 4303.75,2697.75 4499.85,2697.75 ; v1(4273,3562) 4272.57,3561.57 4272.57,2927.43 4407.76,2792.24 4499.85,2792.24 ; v1(4308,2632) 4308,2637 4337.25,2666.25 4499.85,2666.25 ; v1(4313,3532) 4312.13,3531.13 4312.13,2926.84 4415.24,2823.73 4499.85,2823.73 ; v1(4338,2597) 4375.76,2634.76 4499.85,2634.76 ; 4348,3422 4347.57,3422.43 ; v1(4358,3487) 4358,3482.43 4347.57,3472 4347.57,3422.43 ; v1(4373,2562) 4414.26,2603.26 4499.85,2603.26 ; v1(4378,2507) 4379.77,2508.77 4499.85,2508.77 ; v1(4403,3452) 4382.57,3431.57 4382.57,2957.43 4453.28,2886.72 4499.85,2886.72 ; v1(4438,3412) 4418,3392 4418,3000.07 4499.85,2918.22 ; v1(4473,3377) 4462.57,3366.57 4462.57,3142.43 4566.78,3038.22 4566.78,2985.15 ; 4499.85,2855.23 4444.77,2855.23 4347.57,2952.43 4347.57,3422.43 ; v1(4508,3342) 4508,3147 4598.28,3056.72 4598.28,2985.15 ; v1(4548,3307) 4548,3152 4629.77,3070.23 4629.77,2985.15 ; v1(4661,2198) 4650.11,2198 4662,2209.89 4662,2266.11 4692.76,2296.87 4692.76,2378.85 ; 4661.27,2985.15 4661.27,3050.27 v1(4683,3072) ; 4666.94,1877 4871.94,1672 5634.57,1672 5684.81,1621.76 ; 4692.76,2985.15 4692.76,2832.24 4881.74,2643.26 ; v1(4702.96,2057) 4758,2057 4816.78,2115.78 4816.78,2376.88 4818.75,2378.85 ; v1(4718,2272) 4718,2274.52 4723,2279.52 4724.26,2278.26 4724.26,2378.85 ; v1(4738,2197.22) 4758.43,2217.65 4758.43,2337.37 4757.72,2338.08 4757.72,2376.88 4755.76,2378.85 ; 4787.25,2985.15 4785.52,2986.88 4785.52,3214.52 4843,3272 ; 4818.75,2985.15 4818.75,3183.76 v1@4853,3218.01 ; 4850.24,2378.85 4850.24,2049.8 v1(4853.04,2047) ; 4850.24,2985.15 4848.28,2987.12 4848.28,3147.39 v1(4862.89,3162) ; 4913,2407 4913,2267 4928,2252 v1(4928,2247) ; 4913.24,2985.15 4913.24,3102.24 4953,3142 v1(4953,3152) ; 4918,2047 4918,2107 4881.74,2143.26 4881.74,2378.85 4881.74,2643.26 ; 4944.73,2378.85 4944.73,2285.27 4947.57,2282.43 4995.5,2234.5 5040.5,2189.5 ; 4944.73,2985.15 4944.73,3073.73 v1(4973,3102) ; v1(4968,2117) 5040.5,2189.5 ; 4976.23,2378.85 4976.23,2298.77 5068.43,2206.57 5462.57,2206.57 5633,2377 5633,2487 5703,2557 v1(5703,3012) ; 4976.23,2985.15 4976.23,3040.23 4998,3062 v1(5008,3062) v1@5018,3062 ; 5007.72,2378.85 5007.72,2307.28 5068,2247 5072.57,2251.57 5447.57,2251.57 v1(5463,2267) ; 5007.72,2985.15 5007.72,2769.24 4881.74,2643.26 ; 5039.22,2985.15 5039.22,3040.78 v1@5018,3062 ; v1(5048,1782) 5283,1782 v1(5288,1787) ; 5106.15,2571.76 5183.24,2571.76 v1(5373,2382) ; 5106.15,2603.26 5231.74,2603.26 v1(5413,2422) ; 5106.15,2634.76 5270.24,2634.76 v1(5398,2507) ; 5106.15,2666.25 5289.66,2666.25 5311.91,2644.01 5312.02,2644.01 5458,2498.03 5458,2357 5388,2287 v1(5298,2287) ; 5106.15,2697.75 5297.25,2697.75 5302.57,2692.43 5302.57,2692.32 5323.32,2671.57 5323.43,2671.57 5485.56,2509.44 5485.56,2509.33 5588,2406.89 v1(5588,2392) ; 5106.15,2729.24 5328.76,2729.24 5354,2704 5352,2702 v1(5346,2702) ; 5106.15,2760.74 5108.12,2758.77 5556.23,2758.77 v1(5558,2757) ; 5106.15,2792.24 5473.24,2792.24 v1(5498,2817) ; 5106.15,2823.73 5409.73,2823.73 5448,2862 v1(5448,2867) ; 5106.15,2855.23 5291.23,2855.23 v1(5298,2862) ; 5106.15,2886.72 5232.72,2886.72 5251,2905 5335,2905 v1(5343,2897) ; 5106.15,2918.22 5211.22,2918.22 5235,2942 5518,2942 5648,3072 5848,3072 5901.03,3018.97 5901.03,2962.28 ; v1(5198,3102) 5158,3062 v1@5018,3062 ; v1(5203,2437) 5208,2432 5208,2337 5243,2302 v1(5243,2292) ; v1(5208,2487) 5333,2362 v1(5333,2352) ; 5384.81,1535.19 5384.81,1621.76 ; v1(5426.31,2635.31) v1(5609.69,2635.31) ; 5495.5,3189.5 5770.5,3189.5 ; 5584.81,1621.76 5663,1543.57 v1(5663,1232) 5663,1072 ; 5708,992 5708,962 5738,932 5861.97,932 5910.56,980.58 5910.56,1138.42 5863,1185.97 v1(5863,1372) ; v1(5778,1787) 5863,1787 v1(5963,1687) ; 5783,1722 5818,1722 5913,1627 v1(5913,1232) ; 5784.81,1621.76 5784.81,1225.19 5883,1127 5883,1027 5848,992 5788,992 ; 5985.5,2394.5 5710.5,2394.5 5495.01,2179.01 5057.02,2179.01 5046.53,2189.5 5040.5,2189.5 ; v1(6058,1142) 6058,1271.96 6063.04,1277 ; 6127.96,1357 6223,1357 ; v1(6143,1597) 6323,1417 6323,1313 6287,1277 6223,1277 ; v1(6208,3492) 6273,3492 ; 6342.96,3492 6408,3492
  Bottom Layer w39.37: 1294.3,4113.54 1373.04,4113.54 ; 1363,3442 1363,3522 1363,3602 1373.04,3612.04 1373.04,3651.09 1373.04,4113.54 ; 1373.04,4162.91 1373.04,4113.54 ; 1388,2982 1703,3297 v1(1788,3297) ; 1428,3362 1427.96,3362.04 1427.96,3442 1432.09,3446.13 1432.09,3651.09 ; 1451.82,2028.14 v1@1621.82,2028.14 ; 1452.8,2141.33 1583,2141.33 ; 1491.15,4162.91 1491.15,4079.85 1568,4003 1809,4003 1904.54,4098.54 1904.54,4110.46 1904.54,4162.91 ; 1583,2457 1583,2141.33 ; v1(1628,1437) 1628,1427 1693,1362 1793,1362 ; v1@1628,2028.14 1791.82,2028.14 1961.82,2028.14 2361.9,2028.14 2381.03,2047.28 2381.03,2154.99 2543.04,2317 ; 1655.5,1729.5 1930.5,1729.5 1955.5,1729.5 ; 1655.5,1904.5 1930.5,1904.5 ; 2120.5,3189.5 2395.5,3189.5 2425.5,3189.5 2543,3307 2853,3307 2938,3392 2938,3457.04 3033,3457.04 3128,3457.04 3233,3457.04 ; 2433,3612 2433,3652 2538,3757 3267,3757 3395.5,3885.5 3395.5,4063.5 3489,4157 4285.2,4157 4433,4009.2 v1@5188,4009.2 ; 2481.03,2047.28 2481.03,2003.97 2658,1827 2803,1827 ; 2533,3612 2538,3607 2538,3527 ; 2538,3462.04 2543,3457.04 2543,3387 ; 2715.5,1954.5 2858,1954.5 2858,2172 2713,2317 2608,2317 2608,2519 2543.2,2583.8 2493,2583.8 2323,2583.8 2312.8,2583.8 1962.8,2233.8 1962.8,2141.33 1792.8,2141.33 v1(1788,2141.33) 1622.8,2141.33 1583,2141.33 ; 2725.5,1379.5 2923,1379.5 ; 2739.18,4104.13 3115.87,4104.13 3233,3987 3233,3912 ; 2803,1527 2803,1612 2858,1667 2928,1667 2933,1662 3203,1662 3203,1570.9 3098,1465.9 ; 2860.5,1954.5 2990.5,1954.5 3021.21,1954.5 ; 2928,1587 2928,1384.5 2923,1379.5 ; 2928,1747 2968,1787 3482.96,1787 3538,1731.96 ; 3098,1877.71 3021.21,1954.5 ; 3870.5,2404.5 4145.5,2404.5 ; v1(4438,3907) 4440.2,3904.8 5363,3904.8 6075.2,3904.8 6408,3572 6453,3572 6538,3487 6538,2672.24 6501.07,2635.31 6174.1,2962.28 6001.03,2962.28 ; 4638,1972 4638,2057 ; 4918,2047 4918,1972 ; 5045.5,2104.5 5320.5,2104.5 ; v1(5188,4002) v1@5188,4009.2 ; v1@5188,4012 v1@5188,4009.2 ; 5363,4007 5360.8,4009.2 v1@5188,4009.2 ; 5398,1027 5398,882 5398,857 5993,857 5993,882 5993,1032 5993,1403 6063,1473 ; 5403,1032 5412,1023 ; 5495.5,3364.5 5770.5,3364.5 5875.5,3364.5 6001.03,3238.97 6001.03,2962.28 ; 5548,992 5443,992 5412,1023 ; 5801.03,2962.28 5801.03,2823.97 5828,2797 5828,2762 5828,2672 5828,2567 ; 6063,1357 6063,1473 ; 6355.5,1739.5 6080.5,1739.5 ; 2923,1379.5 3000.5,1379.5 3017,1363 3419,1363 3455.5,1399.5 3730.5,1399.5 4215.5,1399.5 4490.5,1399.5 5040.5,1399.5 5315.5,1399.5 5355.5,1399.5 5412,1343 5412,1023 ; 3021.21,1954.5 3435.5,1954.5 3450.5,1939.5 3725.5,1939.5 4470.5,1939.5 4480.5,1929.5 4510,1959 4918,1959 4918,1972 ; 4918,1972 4960.5,1929.5 5045.5,1929.5 5320.5,1929.5 5384.81,1865.19 5384.81,1721.76 5484.81,1721.76 5584.81,1721.76 5684.81,1721.76 5684.81,2193.81 5710.5,2219.5 5985.5,2219.5 ; 5985.5,2219.5 5985.5,1834.5 6080.5,1739.5 ; 5985.5,2219.5 6093,2327 6093,2447 5973,2567 5930.2,2567 5930.2,2672 5930.2,2762 5930.2,2824.2 6001.03,2895.03 6001.03,2962.28 ; 6063,1473 6063,1722 6080.5,1739.5
  Bottom Layer w59.06: 1238,1532 1298,1592 2038,1592 2103,1527 ; 1393,1107 1393,1367 1528,1502 1938,1502 2193,1247 2197.9,1252 2192.98,1738.82 2103,1827 ; 1413,917 1413,973 1495,1055 1495,1203 v1(1619,1327) ; v1(1690.87,2901.96) 1900.83,2692 2613,2692 v1(2998,2307) ; 1813,917 1868,917 2198,1247 ; 2304,911 2304,1125 v1(2364,1185) ; 2503,1527 2503,1262 2612,1153 2612,1154 2655,1111 3360,1111 3445,1026 3445,907 ; 2503,1827 2398,1722 2398,1247 2738,907 3045,907
  Bottom Layer w78.74: 1388,2982 1388,2849.13 1425.13,2812 1425.13,2504.13 1378,2457 1583,2457
  other v1: 4862.89,3218.01 4862.89,3272 1358,3567
  other v2: 4621,2537 4621,2603 4980,2603 4621,2662 4980,2662 4621,2722 4980,2722 4621,2781 4980,2781 4621,2850 4739,2850 4802,2850 4863,2850 4980,2850
  other v3: 4793,2672

## Other copper
Top Layer:
  rectangle: 4678,2787 4915,2806
  region: 5485.36,1407.94 5555.73,1480.4 5482,1552 5411.63,1479.55
  rectangle: 4711,2594 4876,2759
  region: 2321,3744 2255,3678 2255,3644 2376,3644 2378,3646
  region: 4480.5,2104.5 4404,2181 4404,2136.5 4372,2104.5
  region: 5188,4002 5279,4002 5198,3921
  region: 6313,3447 6238,3372 6387,3372 6390,3369
  region: 5913,1197 5944,1166 5944,1151 5892,1151 5885,1158
  region: 2316,3725 2285,3694 2285,3693 2343,3693 2345,3695
  region: 1816,3486 1740,3410 1740,3484 1743,3487
  region: 1109,2894 1188,2815 1188,2802 1110,2724
  text "PHOTODENT.XRAY CO." at 5892,4049 h47.24
  text "433MHz" at 1322,3633 h78.74
Bottom Layer:
  rectangle: 4578,2477 5018,2882
  region: 6042,1342 5992,1292 5992,1338 5997,1343
  region: 2410,2212 2245,2047 2245,2022 2392,2022
  region: 1425.13,2591 1540,2476.13 1540,2457 1412,2457
  region: 2858,2038 2781,1961 2944.25,1961 2950.75,1954.5
  region: 2086,1392 2188,1454 2198,1436 2198,1382 2193,1377
  region: 1473,2460 1583,2350 1583,2459 1590,2466
  region: 1950,2245 1856,2151 1856,2144 1960.13,2144 1962.8,2141.33
  region: 3115,1875 3150,1910 3194.5,1954.5 3031.75,1956 3030.25,1954.5
  region: 2925,1471 3000,1396 2859,1396 2848,1385
  region: 3098,1465.9 2996,1662 3013,1660 3015,1662 3203,1662 3203,1570.9
  region: 2081,1333 2081,1150 2088,1143 2174,1229 2174,1258
  region: 2057,1393 2203,1393 2197.9,1387.9 2197.9,1252
  region: 1583,2233 1664,2152 1653.33,2141.33 1583,2141.33
  region: 2610,2392 2617,2423 2739,2319 2730,2310 2617,2310
  region: 4913,2009 4909,2009 4872,1972 4918,1972
  region: 4638,2039 4638,2027 4698,1967 4577,1967
  region: 5005.75,1968.87 4929,1987 4929,1961 4960.5,1929.5 5005.75,1929.5
  region: 5384.81,1806 5469.05,1721.76 5384.81,1721.76
  region: 5614,1725 5689,1800 5689,1725.95 5684.81,1721.76
  region: 6082,1332 6008,1332 5997,1343 5997,1413 6020,1413 6033,1426
  region: 5548,992 5545.36,989.36 5398,989.36 5398,882 5426,854 5621,854
  region: 5384.81,1567 5342,1524.19 5342,1524 5381.81,1524 5384.81,1527
  region: 2993,3457.04 2943.96,3408 2943,3408 2943,3452.04 2938,3457.04
  region: 1787.5,3985 1789.5,3983 2038.5,3983 1918.5,4103
  text "Serial & ISP" at 6908,5007 h47.24
  text "CONVERTER" at 6808,4927 h39.37
  text "SINCE 2016" at 6458,4267 h39.37
  text "EHP COMPANY" at 6928,4262 h39.37
  text "BT2.4 GHz" at 2198,3846 h78.74
  text "XRAY-DENTAL MACHINE" at 6051,3764 h78.74
  text "POWERED BY EHP PRODUCTS." at 6039,3659 h47.24
  text "V3.0" at 4883,3643 h78.74
  text "DESIGNED BY EHSAN SHAGHAEI" at 5136,1040 h59.06

## Silkscreen, mask and mechanical layers (free items; w line width, h text height)
Top Overlay:
  lines w10: 2745.32,1402 2745.32,1423.51 2981.54,1423.51 2981.54,1187.29 2745.32,1187.29 2745.32,1415.83 ; 6028.16,4232 6028.16,5132.79 6968.79,5132.79 6968.79,4236.21 ; 6033.16,4232 6968.79,4232 ; 1048,767 1048,4202 6973,4202 6973,767 1048,767 ; 1485.48,3431.39 1721.7,3431.39 1721.7,3667.61 1485.48,3667.61 1485.48,3431.39 ; 1682.33,1187.29 1918.55,1187.29 1918.55,1423.51 1682.33,1423.51 1682.33,1187.29 ; 1682.33,1699.1 1682.33,1935.32 1918.55,1935.32 1918.55,1699.1 1682.33,1699.1 ; 2135.08,3158.3 2371.3,3158.3 2371.3,3394.52 2135.08,3394.52 2135.08,3158.3 ; 2745.32,1910 2745.32,2132.17 2967.5,2132.17 2967.5,1910 2745.32,1910 ; 2922.48,2880.21 2922.48,3667.61 4969.73,3667.61 4969.73,2880.21 2922.48,2880.21 ; 3479.31,1187.29 3715.53,1187.29 3715.53,1423.51 3479.31,1423.51 3479.31,1187.29 ; 3479.31,1895.95 3715.53,1895.95 3715.53,2132.17 3479.31,2132.17 3479.31,1895.95 ; 3887.05,2378.24 4123.27,2378.24 4123.27,2614.46 3887.05,2614.46 3887.05,2378.24 ; 4227.34,1187.29 4463.56,1187.29 4463.56,1423.51 4227.34,1423.51 4227.34,1187.29 ; 4227.34,1895.95 4227.34,2132.17 4463.56,2132.17 4463.56,1895.95 4227.34,1895.95 ; 5067.68,1187.29 5303.9,1187.29 5303.9,1423.51 5067.68,1423.51 5067.68,1187.29 ; 5067.68,1895.95 5303.9,1895.95 5303.9,2132.17 5067.68,2132.17 5067.68,1895.95 ; 5504.09,3157.83 5757.13,3157.83 5757.13,3394.05 5504.09,3394.05 5504.09,3157.83 ; 6102.04,1187.29 6328,1187.29 6328,1413.25 6102.04,1413.25 6102.04,1187.29 ; 6102.04,1709.37 6328,1709.37 6328,1935.32 6102.04,1935.32 6102.04,1709.37 ; 6298.89,3441.65 6524.85,3441.65 6524.85,3667.61 6298.89,3667.61 6298.89,3441.65
  text "EHP" at 6178,4622 h39.37
  text "2.4GHz" at 2208,4122 h78.74 r270
  text "433MHz" at 2833,4052 h78.74
  text "XRAY-DENTAL MACHINE" at 4113,3992 h141.73
  text "v 3.0" at 6388,3852 h78.74
  text "POWERED BY EHP PRODUCTS." at 4118,3847 h78.74
  text "PHOTODENT.XRAY CO." at 3152,2754 h98.43
  text "DESIGNED BY EHSAN SHAGHAEI" at 3248,1627 h78.74
Bottom Overlay:
  text "DANGER" at 3373,877 h78.74
Mechanical 1:
  lines w10: 6013,4222 6013,5152 6988,5152 6988,4217 ; 6988,4217 6988,748 1033,748 1033,4217 6988,4217

## Text inside footprints (layer, text, board x,y; h text height)
B1: Bottom Overlay "+" at 6246.07,2725.31 h66.93
DS1: Top Overlay "1" at 3553,2972 h60; Top Overlay "12" at 3533,3542 h60
P3: Bottom Overlay "1" at 5842.29,1615.46 h47.24 r270; Bottom Overlay "2" at 5842.29,1706.02 h47.24 r270; Bottom Overlay "9" at 5294.02,1606.25 h47.24 r270; Bottom Overlay "10" at 5290.09,1688.93 h47.24 r270
P900: Top Overlay "1" at 6817.29,4468.54 h47.24 r270; Top Overlay "2" at 6817.29,4377.98 h47.24 r270; Top Overlay "9" at 6269.02,4477.75 h47.24 r270; Top Overlay "10" at 6265.09,4395.07 h47.24 r270
Q1: Bottom Overlay "3" at 3003,1725 h27.56 r90; Bottom Overlay "1" at 2999.26,1616 h27.56 r90